# Altium PCB DDS.PcbDoc (part 1 of 2)
Units mm, origin at the board's own origin, x right, y up, seen from the top; angles counter-clockwise.
Board outline 60 x 140 mm, 4 copper layers (Top Layer, GND, Supply, Bottom Layer), stack 0.778 mm thick; 241 components, 138 nets, 781 pads, 160 vias.
Unrouted connection lines stored in the file: 258.
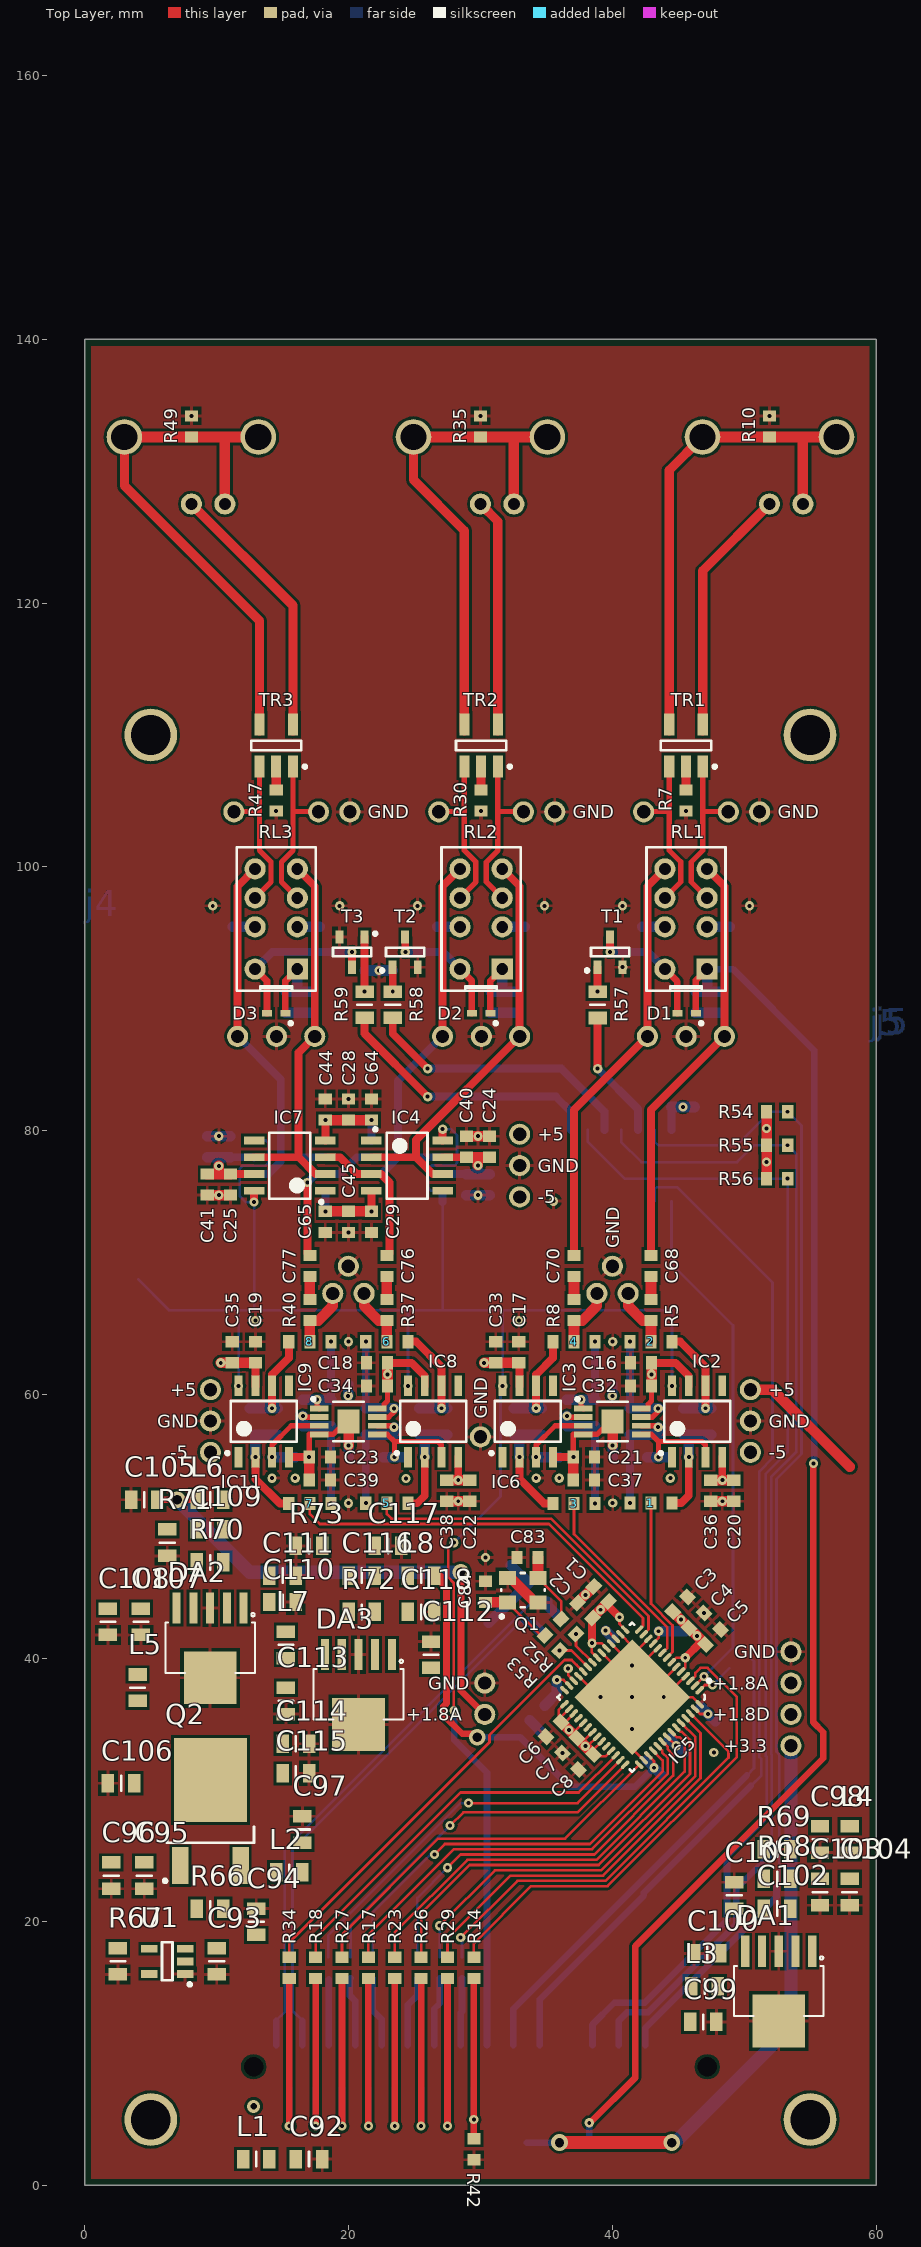
[diagram p0: Top Layer view]
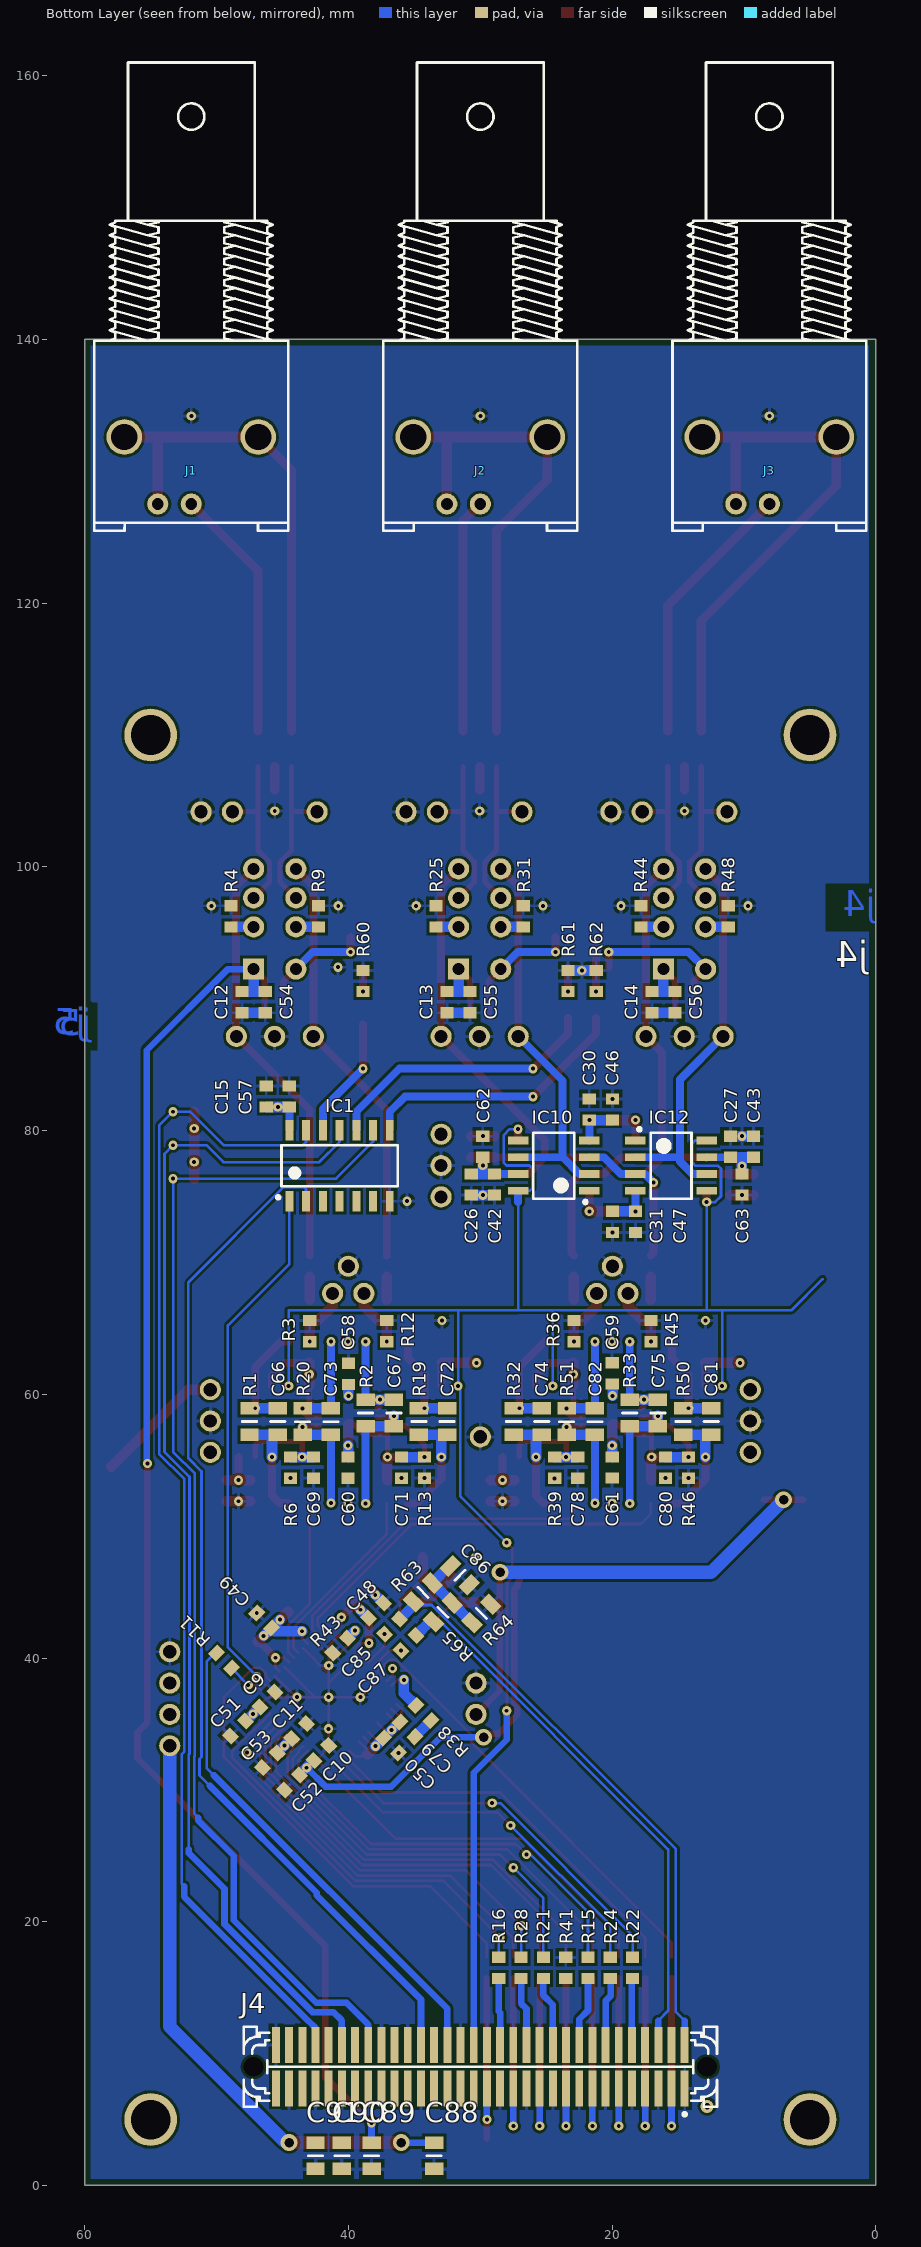
[diagram p1: Bottom Layer view, seen from below]
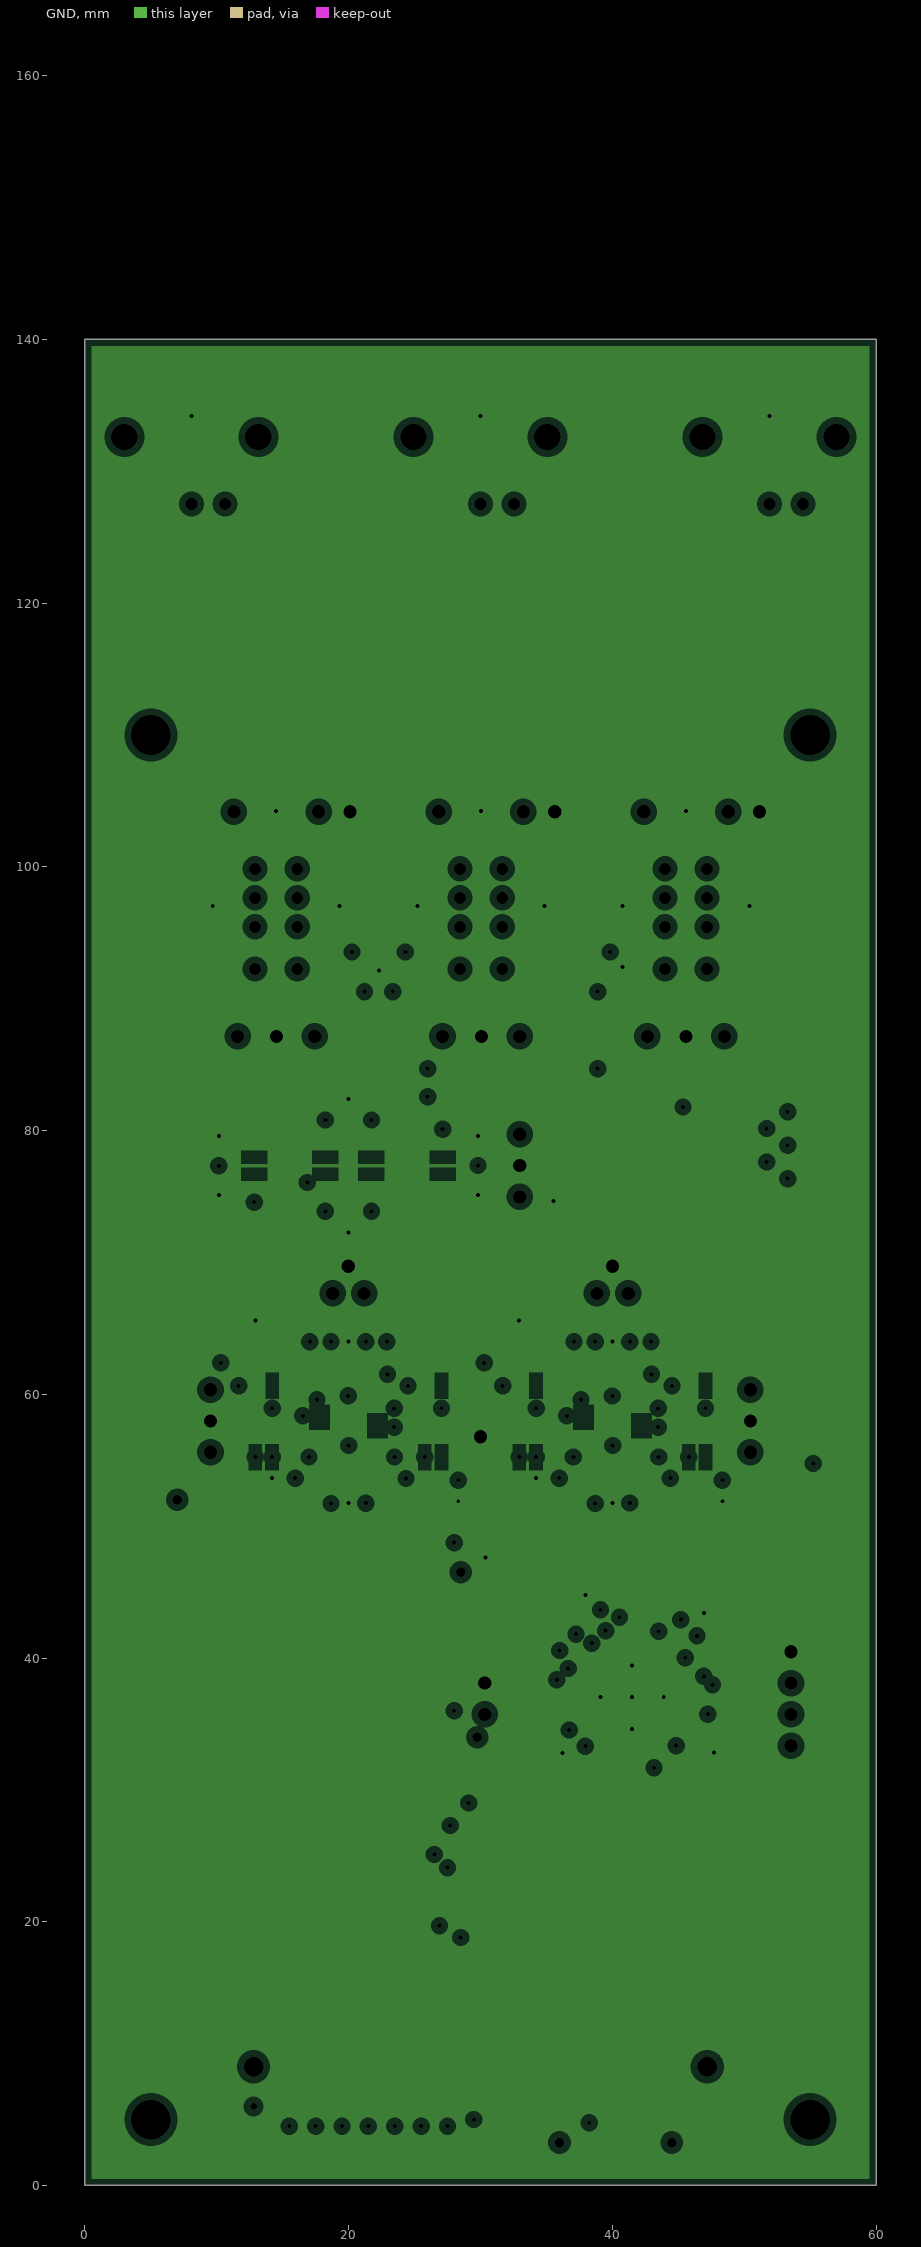
[diagram p2: GND, clearances drawn from the general rule]
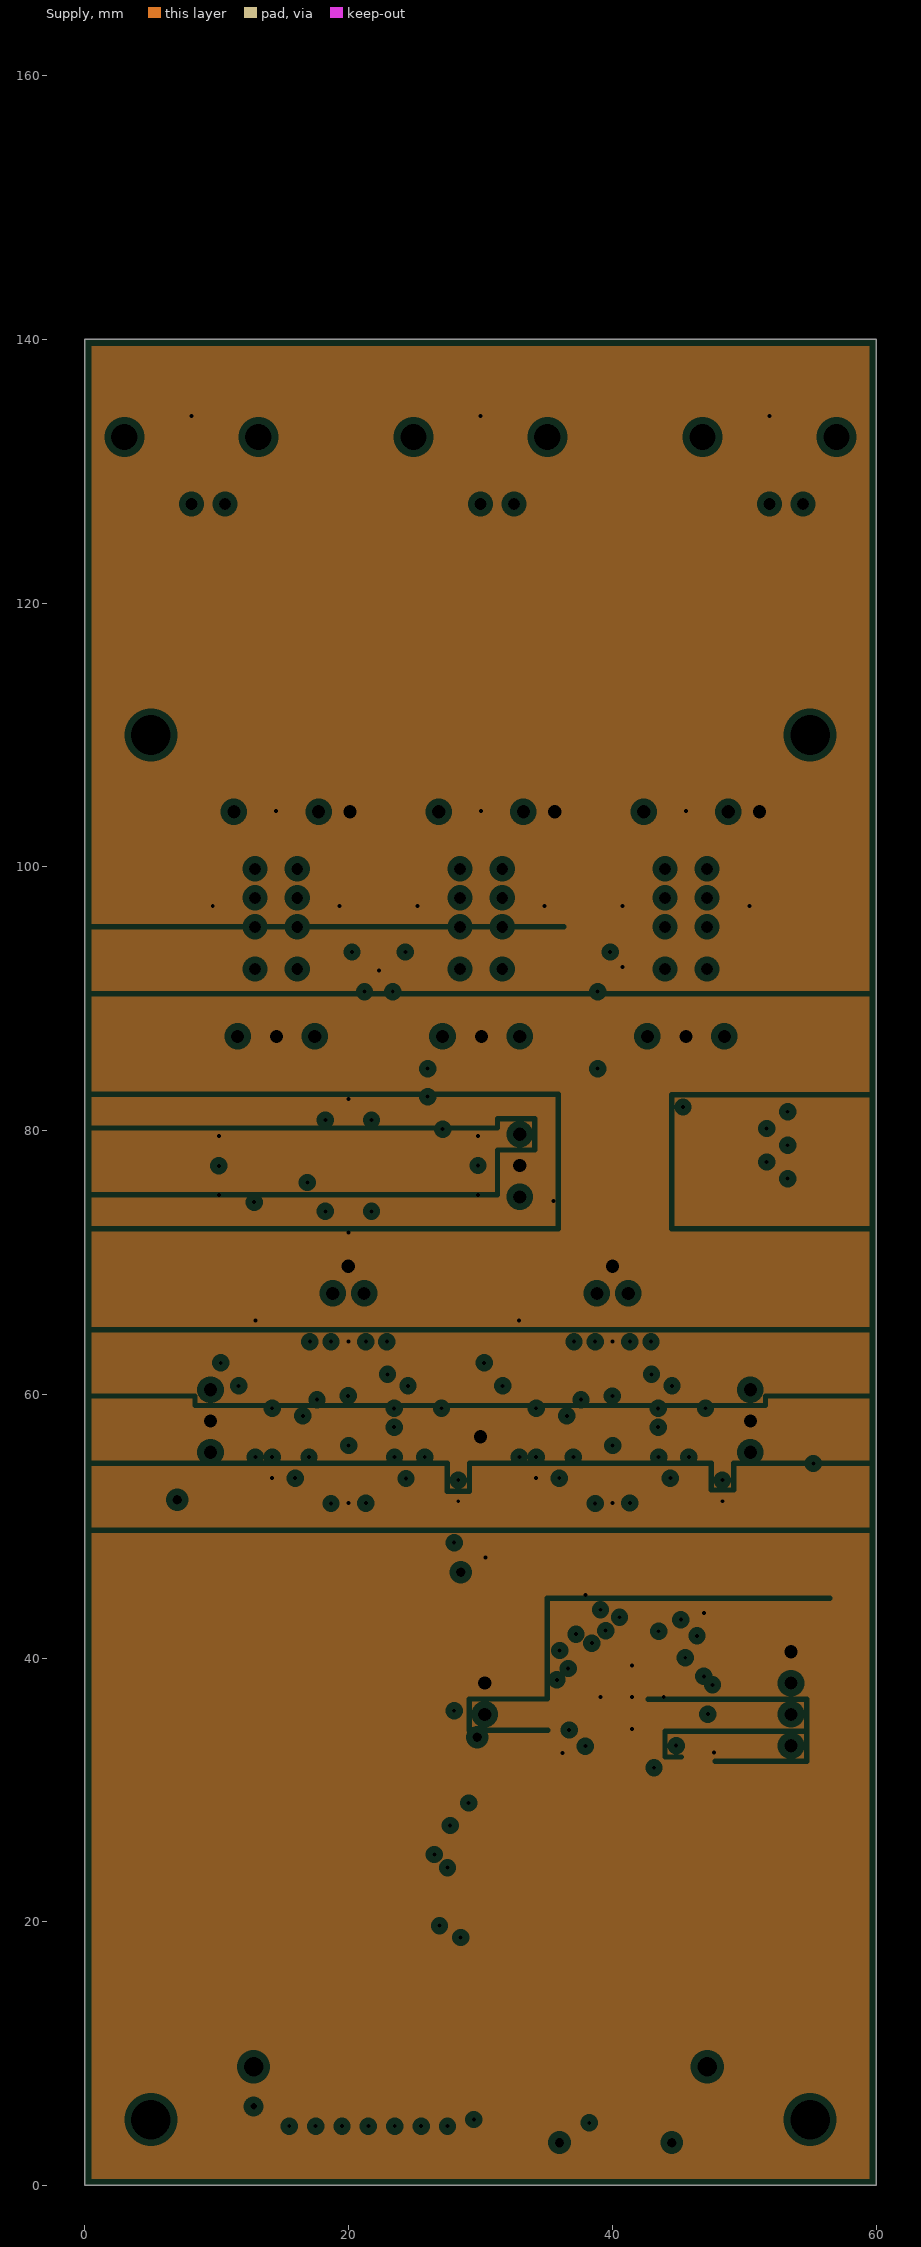
[diagram p3: Supply, clearances drawn from the general rule]
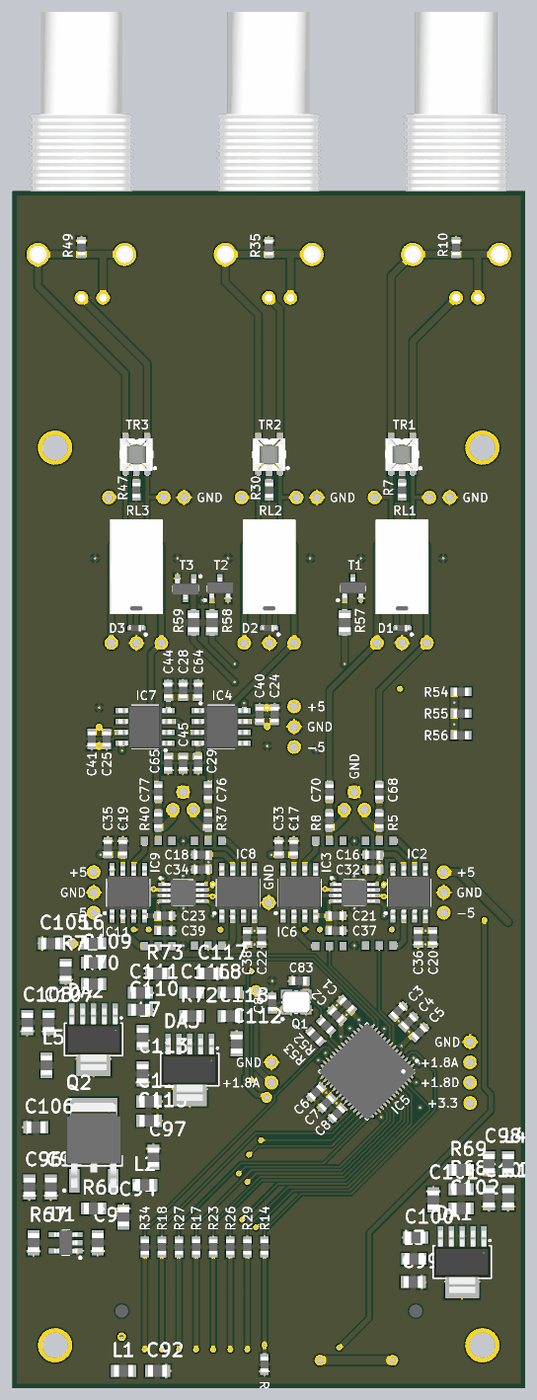
[diagram p5: 3D render of the assembled board from above, using the file's embedded part models]
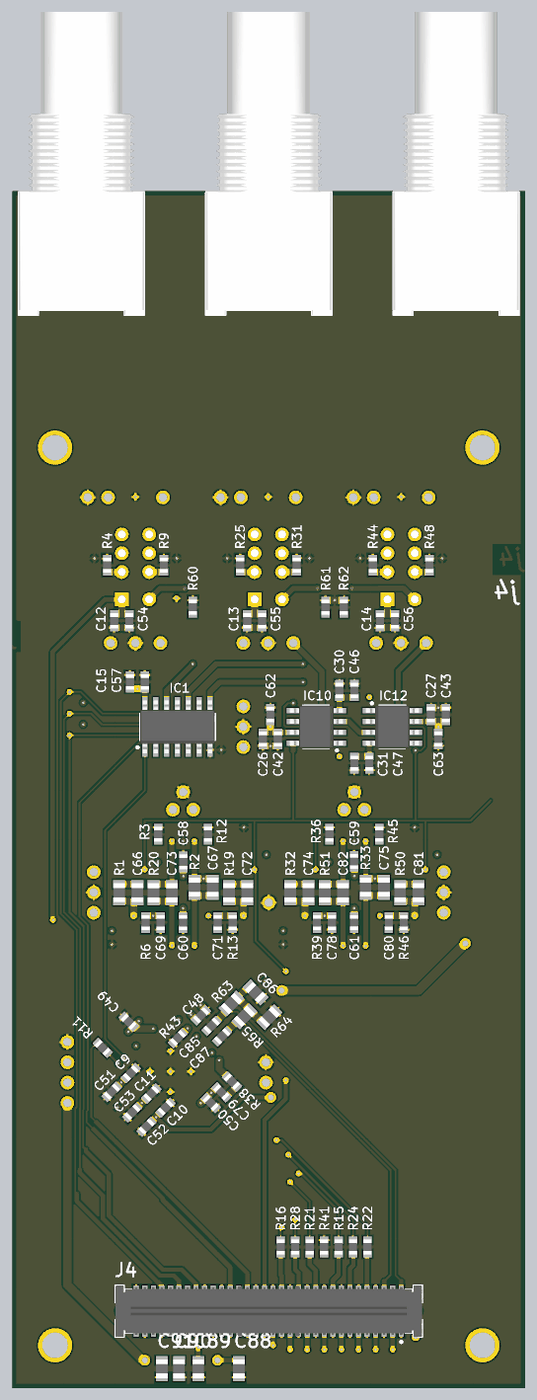
[diagram p6: 3D render of the assembled board from below, using the file's embedded part models]

## Layer stack, top to bottom
Top Solder: solder mask 0.0102, Solder Resist, Dk 3.5
Top Layer: signal copper 0.0356
Dielectric 1: core 0.254, FR-4, Dk 4.2
GND: plane copper 0.036, net GND
Dielectric 2: prepreg 0.127, Dk 4.2
Supply: plane copper 0.036, net GND
Dielectric 3: core 0.254, Dk 4.2
Bottom Layer: signal copper 0.0356
Bottom Solder: solder mask 0.0102, Solder Resist, Dk 3.5

## Board outline
0,0 60,0 60,140 0,140

## Design rules (kind name [scope] priority, off if disabled: settings)
Clearance [All] p1: gap=0.2 ignorepadtopadclearanceinfootprint=FALSE except(0: Arc-Hole Track-Hole SMDPad-Hole THPad-Hole Via-Hole Fill-Hole Poly-Hole Region-Hole Text-Hole)
ComponentClearance [All] p1: gap=0 collisioncheckmode=3 verticalgap=0 showdistances=FALSE
HoleSize [All] p1: absolutevalues=TRUE maxlimit=2.54 minlimit=0.3 maxpercent=80.000 minpercent=20.000
PlaneClearance [All] p1: clearance=0.508
PlaneConnect [All] p1: planeconnectstyle=Relief reliefexpansion=0.508 reliefentries=4 reliefconductorwidth=0.254 reliefairgap=0.254
PolygonConnect [All] p1: connectstyle=Relief reliefconductorwidth=0.254 reliefentries=4 polygonreliefangle="90 Angle" airgapwidth=0.254
RoutingVias [All] p1: holewidth=0.3 width=0.6 viastyle="Through Hole" minholewidth=0.3 minwidth=0.6 maxholewidth=2 maxwidth=2.7
SilkToSilkClearance [All] p1: silktosilkclearance=0.2
SolderMaskExpansion [All] p1: expansion=0.102
Width [All] p1: maxlimit=1.5 minlimit=0.2 preferedwidth=0.2
25 further rules are at their usual default settings.

## Classes and differential pairs
component class DDS_LDOs: C92 C93 C94 C95 C96 C97 C98 C99 C100 C101 C102 C103 C104 C105 C106 C107 C108 C109 C110 C111 C112 C113 C114 C115 C116 C117 C118 DA1 DA2 DA3 L1 L2 L3 L4 L5 L6 L7 L8 Q2 R66 R67 R68 R69 R70 R71 R72 R73 U1
component class DDS: 1 2 3 4 5 6 7 8 * C1 C2 C3 C4 C5 C6 C7 C8 C9 C10 C11 C12 C13 C14 C15 C16 C17 C18 C19 C20 C21 C22 C23 C24 C25 C26 C27 C28 C29 C30 C31 C32 C33 C34 C35 C36 C37 C38 C39 C40 C41 C42 C43 C44 C45 C46 C47 C48 C49 C50 C51 C52 C53 C54 C55 C56 C57 C58 C59 C60 C61 C62 C63 C64 C65 C66 C67 C68 C69 C70 C71 C72 C73 C74 C75 C76 C77 C78 C79 C80 C81 C82 C83 C84 C85 C86 C87 C88 C89 C90 C91 D1 D2 D3 IC1 IC2 IC3 IC4 IC5 IC6 IC7 IC8 IC9 IC10 IC11 IC12 J1 J2 J3 J4 J6 Q1 R1 R2 R3 R4 R5 R6 R7 R8 R9 R10 R11 R12 R13 R14 R15 R16 R17 R18 R19 R20 R21 R22 R23 R24 R25 R26 R27 R28 R29 R30 R31 R32 R33 R34 R35 R36 R37 R38 R39 R40 R41 R42 R43 R44 R45 R46 R47 R48 R49 R50 R51 R52 R53 R54 R55 R56 R57 R58 R59 R60 R61 R62 R63 R64 R65 RL1 RL2 RL3 T1 T2 T3 TR1 TR2 TR3

## Components (designator, comment, footprint, x,y, rotation, side; value= is the part's Value field where it differs from the comment)
1 "Jumper" JUMPER 44.534,51.753 r180 top
2 "Jumper" JUMPER 44.534,63.99 r180 top
3 "Jumper" JUMPER 35.496,51.715 r0 top
4 "Jumper" JUMPER 35.496,63.99 r0 top
5 "Jumper" JUMPER 24.504,51.74 r180 top
6 "Jumper" JUMPER 24.504,63.99 r180 top
7 "Jumper" JUMPER 15.466,51.715 r0 top
8 "Jumper" JUMPER 15.466,63.99 r0 top
C1 "100n" 0603 39.159,44.852 r135 top
C2 "100n" 0603 37.921,43.615 r135 top
C3 "100n" 0603 45.151,44.078 r45 top
C4 "100n" 0603 46.389,42.84 r45 top
C5 "100n" 0603 47.626,41.603 r45 top
C6 "100n" 0603 35.534,34.596 r225 top
C7 "100n" 0603 36.772,33.359 r225 top
C8 "100n" 0603 38.009,32.121 r225 top
C9 "100n" 0603 46.134,36.853 r135 bottom
C10 "100n" 0603 42.059,32.803 r135 bottom
C11 "100n" 0603 43.734,34.453 r135 bottom
C12 "100n" 0603 48.064,89.74 r270 bottom
C13 "100n" 0603 32.525,89.74 r270 bottom
C14 "100n" 0603 16.986,89.74 r270 bottom
C15 "100n" 0603 46.235,82.59 r90 bottom
C16 "100n" 0603 42.175,62.39 r180 top
C17 "100n" 0603 32.91,63.19 r90 top
C18 "100n" 0603 22.15,62.39 r180 top
C19 "100n" 0603 12.93,63.19 r90 top
C20 "100n" 0603 49.215,52.69 r270 top
C21 "100n" 0603 37.845,55.24 r0 top
C22 "100n" 0603 29.19,52.69 r270 top
C23 "100n" 0603 17.82,55.24 r0 top
C24 "100n" 0603 30.685,78.775 r90 top
C25 "100n" 0603 11.035,75.905 r270 top
C26 "100n" 0603 30.685,75.905 r270 bottom
C27 "100n" 0603 11.035,78.775 r90 bottom
C28 "100n" 0603 19.985,81.6 r90 top
C29 "100n" 0603 21.735,73.08 r270 top
C30 "100n" 0603 21.735,81.6 r90 bottom
C31 "100n" 0603 19.985,73.08 r270 bottom
C32 "10n" 0603 42.175,60.64 r0 top
C33 "10n" 0603 31.16,63.19 r270 top
C34 "10n" 0603 22.15,60.64 r0 top
C35 "10n" 0603 11.18,63.19 r270 top
C36 "10n" 0603 47.465,52.69 r90 top
C37 "10n" 0603 37.845,53.49 r180 top
C38 "10n" 0603 27.44,52.69 r90 top
C39 "10n" 0603 17.82,53.49 r180 top
C40 "10n" 0603 28.935,78.775 r270 top
C41 "10n" 0603 9.285,75.905 r90 top
C42 "10n" 0603 28.935,75.905 r90 bottom
C43 "10n" 0603 9.285,78.775 r270 bottom
C44 "10n" 0603 18.235,81.6 r270 top
C45 "10n" 0603 19.985,73.08 r90 top
C46 "10n" 0603 19.985,81.6 r270 bottom
C47 "10n" 0603 18.235,73.08 r90 bottom
C48 "10u" 0603 37.921,43.615 r315 bottom
C49 "10u" 0603 46.389,42.84 r225 bottom
C50 "10u" 0603 36.772,33.359 r45 bottom
C51 "10u" 0603 48.366,34.646 r135 bottom
C52 "10u" 0603 44.291,30.571 r135 bottom
C53 "10u" 0603 45.966,32.246 r135 bottom
C54 "10u" 0603 46.314,89.74 r90 bottom
C55 "10u" 0603 30.775,89.74 r90 bottom
C56 "10u" 0603 15.236,89.74 r90 bottom
C57 "10u" 0603 44.485,82.59 r270 bottom
C58 "10u" 0603 40,61.55 r270 bottom
C59 "10u" 0603 20,61.59 r270 bottom
C60 "10u" 0603 40.03,54.44 r90 bottom
C61 "10u" 0603 20,54.443 r90 bottom
C62 "10u" 0603 29.81,78.775 r270 bottom
C63 "10u" 0603 10.16,75.905 r90 bottom
C64 "10u" 0603 21.735,81.6 r270 top
C65 "10u" 0603 18.235,73.08 r90 top
C66 "=Value" 0805 45.365,57.943 r90 bottom
C67 "=Value" 0805 36.557,58.58 r90 bottom
C68 "=Value" 0603 42.934,69.73 r90 top
C69 "1n" 0603 42.65,54.44 r90 bottom
C70 "=Value" 0603 37.096,69.73 r90 top
C71 "1n" 0603 34.225,54.44 r270 bottom
C72 "=Value" 0805 32.517,57.943 r90 bottom
C73 "=Value" 0805 41.334,57.93 r90 bottom
C74 "=Value" 0805 25.342,57.943 r90 bottom
C75 "=Value" 0805 16.527,58.58 r90 bottom
C76 "=Value" 0603 22.904,69.73 r90 top
C77 "=Value" 0603 17.066,69.73 r90 top
C78 "1n" 0603 22.612,54.44 r90 bottom
C79 "680p" 0603 35.534,34.596 r225 bottom
C80 "1n" 0603 14.2,54.44 r270 bottom
C81 "=Value" 0805 12.487,57.943 r90 bottom
C82 "=Value" 0805 21.304,57.93 r90 bottom
C83 "39p" 0603 33.565,47.623 r180 top
C84 "39p" 0603 30.389,45.022 r90 top
C85 "100n" 0603 36.684,42.378 r135 bottom
C86 "0.1n" 0805 31.55,46.275 r225 bottom
C87 "100n" 0603 35.447,41.14 r135 bottom
C88 "100nF" 0805 33.5,2.25 r90 bottom
C89 "100nF" 0805 38.25,2.25 r90 bottom
C90 "100nF" 0805 40.5,2.25 r90 bottom
C91 "100nF" 0805 42.5,2.25 r90 bottom
C92 "10uF" 0805 17,2 r180 top
C93 "2u2" 0805 10,17 r90 top
C94 "100nF" 0805 13,20 r270 top
C95 "100nF" 0805 4.5,23.5 r90 top
C96 "2u2" 0805 2,23.5 r90 top
C97 "100nF" 0805 16.5,27 r270 top
C98 "100nF" 0805 55.75,26.25 r90 top
C99 "10uF" 0805 46.9,12.4 r180 top
C100 "2u2" 0805 47.2,17.6 r0 top
C101 "100nF" 0805 49.25,22 r270 top
C102 "10nF" 0805 52.5,21 r0 top
C103 "100nF" 0805 55.75,22.25 r90 top
C104 "2u2" 0805 58,22.25 r90 top
C105 "100nF" 0805 4.5,52 r0 top
C106 "10uF" 0805 2.75,30.5 r0 top
C107 "2u2" 0805 4.25,42.75 r90 top
C108 "100nF" 0805 1.75,42.75 r90 top
C109 "10nF" 0805 9.5,49.75 r0 top
C110 "100nF" 0805 15,44.25 r180 top
C111 "2u2" 0805 15,46.25 r180 top
C112 "100nF" 0805 26.25,40.25 r270 top
C113 "10uF" 0805 15.25,36.75 r90 top
C114 "2u2" 0805 16,33.5 r180 top
C115 "100nF" 0805 16,31.25 r180 top
C116 "10nF" 0805 21,46.25 r0 top
C117 "100nF" 0805 23,48.5 r180 top
C118 "2u2" 0805 25.5,43.5 r180 top
D1 "Diode" SODFL1608X65N 45.639,88.89 r180 top
D2 "Diode" SODFL1608X65N 30.05,88.89 r180 top
D3 "Diode" SODFL1608X65N 14.511,88.89 r180 top
DA1 "REG104GAADJ" SOT223_6-127 52.623,14.754 r180 top value=ADJ
DA2 "REG104GAADJ" SOT223_6-127 9.5,40.786 r180 top value=ADJ
DA3 "REG104GAADJ" SOT223_6-127 20.75,37.25 r180 top value=ADJ
IC1 "74HC14" SOIC127P600X175-14N 40.675,77.34 r90 bottom
IC2 "OPA690" SOIC127P600X175-8N 46.435,57.94 r90 top
IC3 "LTC6229" SOP65P490X110-9N-R168X188 40.01,57.94 r0 top
IC4 "OPA690" SOIC127P600X175-8N 24.435,77.34 r0 top
IC5 "AD9958" QFN50P800X800X80-57N-S670 41.5,37.032 r225 top
IC6 "OPA690" SOIC127P600X175-8N 33.59,57.94 r90 top
IC7 "OPA690" SOIC127P600X175-8N 15.535,77.34 r180 top
IC8 "OPA690" SOIC127P600X175-8N 26.41,57.94 r90 top
IC9 "LTC6229" SOP65P490X110-9N-R168X188 19.985,57.94 r0 top
IC10 "OPA690" SOIC127P600X175-8N 24.435,77.34 r0 bottom
IC11 "OPA690" SOIC127P600X175-8N 13.565,57.94 r90 top
IC12 "OPA690" SOIC127P600X175-8N 15.535,77.34 r180 bottom
J1 "TYCO-5413879" TYCO_1-5413879 51.92,133 r90 bottom
J2 "TYCO-5413879" TYCO_1-5413879 30,133 r90 bottom
J3 "TYCO-5413879" TYCO_1-5413879 8.08,133 r90 bottom
J4 "PCI_PMC" TYCO_120527-1 12.8,9 r0 bottom
L1 "BLM211k" 0805 13,2 r180 top value=1k
L2 "BLM211k" 0805 15.5,23.75 r0 top value=1k
L3 "BLM211k" 0805 47,15.1 r0 top value=1k
L4 "BLM211k" 0805 58,26.25 r90 top value=1k
L5 "BLM211k" 0805 4,37.75 r90 top value=1k
L6 "BLM211k" 0805 9.5,52 r180 top value=1k
L7 "BLM211k" 0805 15.25,41 r90 top value=1k
L8 "BLM211k" 0805 25.5,46.25 r0 top value=1k
Q1 "CX3225SB" XTAL_KYOCERA_CX3225SB 33.215,45.147 r90 top
Q2 "MJD2955" DPAK 9.53,28.4 r90 top
R1 "=Value" 0805 47.504,57.943 r90 bottom
R2 "=Value" 0805 38.696,58.58 r90 bottom
R3 "1k" 0603 42.934,64.79 r90 bottom
R4 "=Value" 0603 48.899,96.25 r270 bottom
R5 "=Value" 0603 42.934,66.39 r90 top
R6 "3k" 0603 44.4,54.44 r90 bottom
R7 "DNP" 0603 45.589,105.04 r90 top
R8 "=Value" 0603 37.096,66.39 r90 top
R9 "=Value" 0603 42.279,96.25 r270 bottom
R10 "0" 0603 51.92,133.4 r270 top
R11 "1k" 0603 49.441,39.802 r225 bottom
R12 "1k" 0603 37.096,64.79 r270 bottom
R13 "3k" 0603 35.975,54.44 r90 bottom
R14 "1k" 0603 29.5,16.5 r90 top
R15 "1k" 0603 21.833,16.5 r90 bottom
R16 "1k" 0603 28.6,16.5 r90 bottom
R17 "1k" 0603 21.5,16.5 r90 top
R18 "1k" 0603 17.5,16.5 r270 top
R19 "=Value" 0805 34.656,57.943 r90 bottom
R20 "=Value" 0805 43.483,57.93 r90 bottom
R21 "1k" 0603 25.217,16.5 r90 bottom
R22 "1k" 0603 18.45,16.5 r270 bottom
R23 "1k" 0603 23.5,16.5 r90 top
R24 "1k" 0603 20.142,16.5 r270 bottom
R25 "=Value" 0603 33.36,96.25 r270 bottom
R26 "1k" 0603 25.5,16.5 r90 top
R27 "1k" 0603 19.5,16.5 r270 top
R28 "1k" 0603 26.908,16.5 r90 bottom
R29 "1k" 0603 27.5,16.5 r90 top
R30 "DNP" 0603 30.05,105.04 r90 top
R31 "=Value" 0603 26.74,96.25 r270 bottom
R32 "=Value" 0805 27.481,57.943 r90 bottom
R33 "=Value" 0805 18.666,58.58 r90 bottom
R34 "1k" 0603 15.5,16.5 r90 top
R35 "0" 0603 30,133.4 r270 top
R36 "1k" 0603 22.904,64.79 r90 bottom
R37 "=Value" 0603 22.904,66.39 r90 top
R38 "0" 0603 34.298,35.833 r45 bottom
R39 "3k" 0603 24.357,54.44 r90 bottom
R40 "=Value" 0603 17.066,66.39 r90 top
R41 "10k" 0603 23.525,16.5 r270 bottom
R42 "10k" 0603 29.5,2.75 r90 top
R43 "1.91k" 0603 40.625,40.937 r135 bottom
R44 "=Value" 0603 17.821,96.25 r270 bottom
R45 "1k" 0603 17.066,64.79 r270 bottom
R46 "3k" 0603 15.95,54.44 r90 bottom
R47 "DNP" 0603 14.511,105.04 r90 top
R48 "=Value" 0603 11.201,96.25 r270 bottom
R49 "0" 0603 8.08,133.4 r270 top
R50 "=Value" 0805 14.626,57.943 r90 bottom
R51 "=Value" 0805 23.453,57.93 r90 bottom
R52 "0" 0603 36.684,42.378 r135 top
R53 "0" 0603 35.447,41.14 r135 top
R54 "100k" 0603 52.5,81.43 r180 top
R55 "100k" 0603 52.5,78.89 r180 top
R56 "100k" 0603 52.5,76.35 r180 top
R57 "6k2" 0805 38.889,89.54 r90 top
R58 "6k2" 0805 23.35,89.54 r90 top
R59 "6k2" 0805 21.211,89.54 r90 top
R60 "100k" 0603 38.889,91.34 r270 bottom
R61 "100k" 0603 23.35,91.34 r270 bottom
R62 "100k" 0603 21.211,91.34 r270 bottom
R63 "49.9" 0805 34.355,44.982 r315 bottom
R64 "49.9" 0805 29.918,43.382 r135 bottom
R65 "49.9" 0805 32.843,43.469 r135 bottom
R66 "56k" 0805 9.5,21 r0 top
R67 "18k" 0805 2.5,17 r90 top
R68 "4k3" 0805 52.5,23.25 r0 top
R69 "1k5" 0805 52.5,25.5 r180 top
R70 "5k1" 0805 9.5,47.25 r0 top
R71 "13k" 0805 6.25,48.75 r90 top
R72 "5k1" 0805 21,43.5 r0 top
R73 "13k" 0805 17,48.5 r0 top
RL1 "G6J-2P_Y" G6J-2P-Y 45.589,96.05 r90 top
RL2 "G6J-2P_Y" G6J-2P-Y 30.05,96.05 r90 top
RL3 "G6J-2P_Y" G6J-2P-Y 14.511,96.05 r90 top
T1 "BC847C" SOT95P230X110-3N 39.837,93.54 r90 top
T2 "BC847C" SOT95P230X110-3N 24.292,93.54 r90 top
T3 "BC847C" SOT95P230X110-3N 20.264,93.54 r270 top
TR1 "TC1-1T+" AT224-1 45.589,109.205 r180 top
TR2 "TC1-1T+" AT224-1 30.05,109.205 r180 top
TR3 "TC1-1T+" AT224-1 14.511,109.205 r180 top
U1 "ADP7182ADJ" SOT23-5 6.25,17 r180 top value=ADJ

## Footprints (in the part's own frame and the unit in brackets; to place one, negate y for a bottom-side part, rotate by r counter-clockwise, add the part's x,y. Pads: shape width x height; smd on the part's side, far side on the other; paste and mask are expansions set on the pad)
0603 [mm] "Chip Resistor, EIA 0603, Metric 1608, Body 1.6x0.8mm, IPC Medium Density"
  rect 0.85x1 smd: 1(-0.8,0) 2(0.8,0)
  body extent -0.87,-0.47 0.88,0.48, height 0.6
0805 [mm] "Chip Resistor, EIA 0805, Metric 2012, Body 2.0x1.2mm, IPC Medium Density"
  rect 0.95x1.4 smd: 1(-1,0) 2(1,0)
  silkscreen extent 0,-0.55 0,0.55, body extent -1.1,-0.67 1.1,0.68, height 0.6
AT224-1 [mm] "MINI-CIRCUITS RF Transformer, Case AT224-1 - Body 3.81X3.81mm"
  rect 0.76x1.65 smd: 1(-1.27,1.59) 2(0,1.59) 3(1.27,1.59) 4(1.27,-1.59) 6(-1.27,-1.59)
  silkscreen extent -2.3,-0.37 1.91,1.72, body extent -1.9,-1.9 1.91,1.91, height 4.06
DPAK [mm] "TO-252AA DPAK TO, 2.28mm pitch; 2 pin,9.90mm L X 6.56mm W X 2.38mm H body, IPC Medium Density"
  rect 2.8x1.25 smd: 1(-4.15,2.28) 2(-4.15,-2.28)
  rect 6.4x5.55 smd: 3(2.35,0)
  silkscreen extent -5.42,-3.3 -1.2,3.57, body extent -4.99,-3.27 4.95,3.27, height 2.28
G6J-2P-Y [mm] "THT Relay, Body 10.9mm x 6mm, OMRON_G6J-2P"
  rect 1.6x1.6 hole 0.9: 1(-3.8,-1.6)
  round 1.6 hole 0.9: 2(-0.6,-1.6) 3(1.6,-1.6) 4(3.8,-1.6) 5(3.8,1.6) 6(1.6,1.6) 7(-0.6,1.6) 8(-3.8,1.6)
  silkscreen extent -5.45,-3 5.45,3, body extent -5.45,-3 5.45,3, height 9.3
JUMPER [mm] "Jumper, SMD"
  rect 0.85x1 smd: 1(0,0) 2(1.6,0) 3(3.2,0)
QFN50P800X800X80-57N-S670 [mm] "QFN,0.50mm Pitch, Square; 56 pin, 8.00mm L X 8.00mm W X 0.80mm H body (6.7mm X 6.7mm thermal tab), IPC Medium Density"
  oval 0.8x0.3 smd: 1(-4,3.25) 2(-4,2.75) 3(-4,2.25) 4(-4,1.75) 5(-4,1.25) 6(-4,0.75) 7(-4,0.25) 8(-4,-0.25) 9(-4,-0.75) 10(-4,-1.25) 11(-4,-1.75) 12(-4,-2.25) 13(-4,-2.75) 14(-4,-3.25) 29(4,-3.25) 30(4,-2.75) 31(4,-2.25) 32(4,-1.75) 33(4,-1.25) 34(4,-0.75) 35(4,-0.25) 36(4,0.25) 37(4,0.75) 38(4,1.25) 39(4,1.75) 40(4,2.25) 41(4,2.75) 42(4,3.25)
  oval 0.3x0.8 smd: 15(-3.25,-4) 16(-2.75,-4) 17(-2.25,-4) 18(-1.75,-4) 19(-1.25,-4) 20(-0.75,-4) 21(-0.25,-4) 22(0.25,-4) 23(0.75,-4) 24(1.25,-4) 25(1.75,-4) 26(2.25,-4) 27(2.75,-4) 28(3.25,-4) 43(3.25,4) 44(2.75,4) 45(2.25,4) 46(1.75,4) 47(1.25,4) 48(0.75,4) 49(0.25,4) 50(-0.25,4) 51(-0.75,4) 52(-1.25,4) 53(-1.75,4) 54(-2.25,4) 55(-2.75,4) 56(-3.25,4)
  rect 6.2x6.2 smd: 57(0,0)
  silkscreen extent -5.12,-4 4,4, body extent -4,-4 4,4, height 0.8
SODFL1608X65N [mm] "Ultra Small Outline Diode Flat Lead (SOD-523), Body; 1.2mm L X 0.8mm W X 0.65mm H, IPC Medium Density"
  rect 0.75x0.5 smd: 1(-0.7,0) 2(0.7,0)
  silkscreen extent -1.23,0.63 -0.98,0.87, body extent -0.82,-0.42 0.83,0.43, height 0.65
SOIC127P600X175-8N [mm] "SOIC 8, Pitch 1.27mm - Body 4x5mm, IPC Medium Density"
  rect 1.55x0.6 smd: 1(-2.7,1.905) 2(-2.7,0.635) 3(-2.7,-0.635) 4(-2.7,-1.905) 5(2.7,-1.905) 6(2.7,-0.635) 7(2.7,0.635) 8(2.7,1.905)
  silkscreen extent -2.52,-2.5 1.55,2.88, body extent -3.1,-2.5 3.1,2.5, height 1.75
SOIC127P600X175-14N [mm] "SOIC 14, Pitch 1.27mm - Body 4x8.75mm, IPC Medium Density"
  rect 1.55x0.6 smd: 1(-2.7,3.81) 2(-2.7,2.54) 3(-2.7,1.27) 4(-2.7,0) 5(-2.7,-1.27) 6(-2.7,-2.54) 7(-2.7,-3.81) 8(2.7,-3.81) 9(2.7,-2.54) 10(2.7,-1.27) 11(2.7,0) 12(2.7,1.27) 13(2.7,2.54) 14(2.7,3.81)
  silkscreen extent -2.52,-4.4 1.55,4.79, body extent -3.1,-4.37 3.1,4.38, height 1.75
SOP65P490X110-9N-R168X188 [mm] "SOP, 0.65mm Pitch; 8 Pin, 3.00mm W X 3.00mm L X 1.10mm H body, (w/Thermal Tab 1.68X 1.88mm), IPC Medium Density"
  rect 1.4x0.45 smd: 1(-2.2,0.975) 2(-2.2,0.325) 3(-2.2,-0.325) 4(-2.2,-0.975) 5(2.2,-0.975) 6(2.2,-0.325) 7(2.2,0.325) 8(2.2,0.975)
  rect 1.65x1.85 smd: 9(0,0)
  silkscreen extent -2.77,-1.5 1.15,1.82, body extent -2.45,-1.55 2.45,1.55, height 1.1
SOT23-5 [mm] "SOT, 0.95mm Pitch; 5 Pin,1.55mm W X 2.90mm L X 1.45mm H body, IPC Medium Density"
  rect 1.25x0.6 smd: 1(-1.35,0.95) 2(-1.35,0) 3(-1.35,-0.95) 4(1.35,-0.95) 5(1.35,0.95)
  silkscreen extent -1.83,-1.45 0.4,1.87, body extent -1.35,-1.45 1.35,1.45, height 1.45
SOT95P230X110-3N [mm] "SOT23, 3 pin, Pitch 0.95mm - 1.3mm W X 2.9mm L X 1.1mm H, IPC Medium Density"
  rect 1x0.6 smd: 1(-1.15,0.95) 2(-1.15,-0.95) 3(1.15,0)
  silkscreen extent -1.52,-1.45 0.33,1.87, body extent -1.08,-1.5 1.25,1.5, height 1.1
SOT223_6-127 [mil]
  rect 24x93 smd paste+0 mask+0: 1(-100,-118.5) 2(-50,-118.5) 3(0,-118.5) 4(50,-118.5) 5(100,-118.5)
  rect 157.48x157.48 smd: 6(0,90)
  silkscreen extent -134,-103 134,75, body extent -129,-143 129,143, height 71
TYCO_1-5413879 [mm] "50 Ohms  BNC Elbow PCB Socket With Mounting Posts"
  round 1.6 hole 0.9: 1(-5.48,0) 2(-5.48,2.54)
  round 2.7 hole 2: 2(-0.4,-5.08) 2(-0.4,5.08)
  silkscreen extent -7.5,-7.35 28,7.35, body extent -7.5,-7.35 28,7.35, height 13.16
TYCO_120527-1 [mm] "1mm Centerline, FH (IEEE 1386) Surface Mount, Stacking Board-to-Board Male Connectors"
  rect 0.6x2.7 smd: 1(1.7,1.65) 2(1.7,-1.65) 3(2.7,1.65) 4(2.7,-1.65) 5(3.7,1.65) 6(3.7,-1.65) 7(4.7,1.65) 8(4.7,-1.65) 9(5.7,1.65) 10(5.7,-1.65) 11(6.7,1.65) 12(6.7,-1.65) 13(7.7,1.65) 14(7.7,-1.65) 15(8.7,1.65) 16(8.7,-1.65) 17(9.7,1.65) 18(9.7,-1.65) 19(10.7,1.65) 20(10.7,-1.65) 21(11.7,1.65) 22(11.7,-1.65) 23(12.7,1.65) 24(12.7,-1.65) 25(13.7,1.65) 26(13.7,-1.65) 27(14.7,1.65) 28(14.7,-1.65) 29(15.7,1.65) 30(15.7,-1.65) 31(16.7,1.65) 32(16.7,-1.65) 33(17.7,1.65) 34(17.7,-1.65) 35(18.7,1.65) 36(18.7,-1.65) 37(19.7,1.65) 38(19.7,-1.65) 39(20.7,1.65) 40(20.7,-1.65) 41(21.7,1.65) 42(21.7,-1.65) 43(22.7,1.65) 44(22.7,-1.65) 45(23.7,1.65) 46(23.7,-1.65) 47(24.7,1.65) 48(24.7,-1.65) 49(25.7,1.65) 50(25.7,-1.65) 51(26.7,1.65) 52(26.7,-1.65) 53(27.7,1.65) 54(27.7,-1.65) 55(28.7,1.65) 56(28.7,-1.65) 57(29.7,1.65) 58(29.7,-1.65) 59(30.7,1.65) 60(30.7,-1.65) 61(31.7,1.65) 62(31.7,-1.65) 63(32.7,1.65) 64(32.7,-1.65)
  round 1 hole 1.5 unplated: 65(0,0) 66(34.4,0)
  silkscreen extent -0.75,-3.03 35.15,3.72, body extent -0.75,-3.03 35.15,3.03, height 8.38
XTAL_KYOCERA_CX3225SB [mm] "SMD Crystal Kyocera, 4 Pin, 3.2mm L X 2.5mm W X 0.6mm H"
  rect 1.05x1.3 smd: 1(-0.925,1.15) 2(-0.925,-1.15) 3(0.925,-1.15) 4(0.925,1.15)
  silkscreen extent -2.12,-1.65 1.3,1.72, body extent -1.3,-1.65 1.3,1.65, height 0.6

## Part data
1 2 3 4 5 6 7 8: "0805"
C1 C2 C3 C4 C5 C6 C7 C8 C9 C10 C11 C12 C13 C14 C15 C16 C17 C18 C19 C20 C21 C22 C23 C24 C25 C26 C27 C28 C29 C30 C31 C32 C33 C34 C35 C36 C37 C38 C39 C40 C41 C42 C43 C44 C45 C46 C47 C48 C49 C50 C51 C52 C53 C54 C55 C56 C57 C58 C59 C60 C61 C62 C63 C64 C65 C66 C67 C68 C69 C70 C71 C72 C73 C74 C75 C76 C77 C78 C79 C80 C81 C82 C83 C84 C85 C86 C87 C88 C89 C90 C91 C92 C93 C94 C95 C96 C97 C98 C99 C100 C101 C102 C103 C104 C105 C106 C107 C108 C109 C110 C111 C112 C113 C114 C115 C116 C117 C118: library part Capacitor
D1 D2 D3: Voltage=30V, Device=RB521S-30, Name to order=RB521S-30, Pkg=SOD523, Price=5, SMD Solders=2, Solder Option=RM, Vendor=CTK
DA1 DA2 DA3: library part REG104GA, "Positive LDO Linear stabilizer", Tolerance="+-2% Max", Device=REG104GA, Name to order=REG104GA-A, Pkg=SOT223-6, Price=1000, SMD Solders=6, Solder Option=RM, TC=70ppm/C, Vendor="Texas Instruments", Vref=1V295
IC1: library part "Hex Inverters", "6 HEX inverters with Schmitt trigger inputs"
IC2 IC4 IC6 IC7 IC8 IC10 IC11 IC12: library part "Single Op Amp", "Wideband, Voltage-Feedback Operational Amplifier With Disable"
IC3 IC9: library part "Dual Op Amp", "0.88nV/vHz 730MHz, 500V/µs, Low Distortion Rail-to-Rail Output Op Amps with Shutdown"
IC5: library part DDS, "2-Channel, 500 MSPS DDS with 10-Bit DACs"
J1 J2 J3: library part Coax
J4: "PCI Mezzanine Connector; IEEE 1386 Mezzanine board", Manufactuer="TE Connectivity", PartField=120527-1, Pkg="PMC Male (IEEE 1386)", SolderOption=2, Vendor="TE Connectivity"
L1 L2 L3 L4 L5 L6 L7 L8: library part BLM21, "SMD Ferrite bead 0805", Device=BLM21, Pkg=SMD0805, Price=10, SMD Solders=2, Solder Option=RM, Vendor=Vishay
Q1: library part "Quartz Crystal", "25 MHz"
Q2: "PNP транзистор", Voltage=-60V, Device=MJD2955, Name to order=MJD29G55, Pkg=DPAK, Price=100, SMD Solders=3, Solder Option=RM, Vendor="ON Semiconductor"
R1 R2 R3 R4 R5 R6 R7 R8 R9 R10 R11 R12 R13 R14 R15 R16 R17 R18 R19 R20 R21 R22 R23 R24 R25 R26 R27 R28 R29 R30 R31 R32 R33 R34 R35 R36 R37 R38 R39 R40 R41 R42 R43 R44 R45 R46 R47 R48 R49 R50 R51 R52 R53 R54 R55 R56 R57 R58 R59 R60 R61 R62 R63 R64 R65 R66 R67 R68 R69 R70 R71 R72 R73: library part Resistor
RL1 RL2 RL3: library part Relay, "Ultra-compact and Slim DPDT Relay"
T1 T2 T3: library part "NPN Transistor", "NPN"
TR1 TR2 TR3: library part Transformer, "50 Ohms 0.4 to 500MHz RF Transformer"
U1: library part ADP7182, "Negative LDO Linear stabilizer", Device=ADP7182, Name to order=ADP7182AUJZ-R7, Pkg=SOT23-5, Price=100, SMD Solders=5, Solder Option=RM, Vendor="Analog Devoces", Vref=1V22

## Free pads (board coordinates)
  round 4 hole 3: 0(5,5) 0(5,110) 0(55,5) 0(55,110)
  round 1.6 hole 1: ""(9.525,55.6) ""(9.525,57.975) ""(9.525,60.35) ""(11.3,104.175) ""(11.586,87.147) ""(14.536,87.147) ""(17.436,87.147) ""(17.722,104.175) ""(18.8,67.65) ""(19.979,69.711) ""(20.097,104.175) ""(21.175,67.65) ""(26.839,104.175) ""(27.125,87.147) ""(30,56.775) ""(30.075,87.147) ""(30.325,35.725) ""(30.325,38.1) ""(32.975,87.147) ""(32.975,74.975) ""(32.975,77.35) ""(32.975,79.725) ""(33.261,104.175) ""(35.636,104.175) ""(38.83,67.65) ""(40.009,69.711) ""(41.205,67.65) ""(42.378,104.175) ""(42.664,87.147) ""(45.6,87.147) ""(48.5,87.147) ""(48.8,104.175) ""(50.475,55.6) ""(50.475,57.975) ""(50.475,60.35) ""(51.175,104.175) ""(53.55,33.35) ""(53.55,35.725) ""(53.55,38.1) ""(53.55,40.475)

## Via types
v1: diameter 0.7, hole 0.3, Top Layer to Bottom Layer, 91 vias
v2: diameter 0.7, hole 0.3, Top Layer to Bottom Layer, tented both sides, 63 vias
v3: diameter 1.27, hole 0.711, Top Layer to Bottom Layer, 5 vias
v4: diameter 1, hole 0.5, Top Layer to Bottom Layer, 1 vias

## Nets (pads, with @x,y where several pads share a name; then routed paths per layer and width w, separated by ;. In a path a pad name is that pad's centre, name@x,y a point inside that pad or via, vN(x,y) a via of type N, cw(c..) or ccw(c..) an arc to the next point about the centre after c; other vN are vias at no path point)
+1.8A: C1.1 C2.1 C3.1 C4.1 C5.1 C6.1 C7.1 C8.1 C48.2 C49.2 C50.2 C79.1 C105.2 IC5.5 IC5.7 IC5.11 IC5.15 IC5.19 IC5.21 IC5.26 IC5.29 IC5.30 IC5.31 IC5.33 IC5.35 IC5.36 IC5.37 IC5.39 L6.2 pad.@30.325,35.725 pad.@53.55,38.1 R6.1 R13.1 R39.1 R46.1 | length 78.4
  Top Layer w0.2: IC5.29@36.373,36.502 35.95,36.078 35.95,35.312 C6.1@36.1,35.162 ; v2(36.651,39.203) 36.651,38.699 IC5.26@37.081,38.269 ; IC5.30@36.727,36.148 36.1,35.521 C6.1@36.1,35.162 ; 36.987,34.287 IC5.33@37.788,35.087 ; IC5.31@37.081,35.795 36.448,35.162 C6.1@36.1,35.162 ; C7.1@37.7,33.586 IC5.35@38.495,34.38 ; v2(37.95,33.312) 38.134,33.312 IC5.36@38.848,34.027 ; C2.1@38.45,43.012 C2.1@38.487,43.049 ; C8.1@38.575,32.687 38.575,33.046 IC5.37@39.202,33.673 ; C8.1@38.725,32.537 39.48,32.537 IC5.39@39.909,32.966 ; IC5.21@38.848,40.037 38.512,40.373 38.45,40.436 v2(38.45,41.126) 39.174,41.126 IC5.19@39.555,40.744 ; C1.1@39.725,43.908 C1.1@39.725,44.287 ; v2(40.541,43.093) 40.541,42.588 IC5.15@40.97,42.159 ; IC5.11@43.091,41.098 43.52,41.527 v2(43.52,42.032) ; IC5.7@44.505,39.684 44.841,40.02 v2(45.532,40.02) 45.532,39.296 IC5.5@45.212,38.977 ; C5.1@46.735,41.222 C5.1@46.875,41.222
  Top Layer w0.5: C105.2@5.5,52 v3(7,52) L6.2@8.5,52 ; v3@28.525,46.475 28.525,37.525 pad.@30.325,35.725
  Top Layer w0.6: v2(38.45,41.126) C2.1@38.45,43.012 ; C1.1@39.725,43.908 v2(40.541,43.093) ; v2(45.532,40.02) C5.1@46.735,41.222
  Top Layer w0.8: C6.1@36.1,35.162 C8.1@38.575,32.687 ; C2.1@38.487,43.049 C1.1@39.725,44.287 ; C3.1@44.586,43.512 C5.1@46.875,41.222
  Top Layer w1: v3(28.5,46.5) v3@28.525,46.475 ; pad.@53.35,38.1 pad.@53.55,38.1
  Bottom Layer w0.2: v2@38.45,41.002 v2(38.45,41.126)
  Bottom Layer w0.8: C79.1@36.1,35.162 v2(37.95,33.312) ; C48.2@38.487,43.049 v2(39.1,43.662) ; v2(43.52,42.032) 45.58,42.032 C49.2@45.823,42.275 ; v2(45.201,42.911) v2(46.426,41.686)
  Bottom Layer w1: v3(7,52) 12.5,46.5 v3(28.5,46.5)
  other v1: 24.357,53.615 15.95,53.64 35.975,53.64 44.4,53.64
  other v2: 36.725,34.537
+1.8D: C9.1 C10.1 C51.2 C52.2 C112.2 IC5.45 IC5.55 L8.2 pad.@53.55,35.725 | length 36.3
  Top Layer w0.2: IC5.45@42.737,32.613 43.167,32.183 v2(43.167,31.679) ; IC5.55@46.273,36.148 46.666,35.755 47.241,35.755 v2(47.249,35.747)
  Top Layer w0.5: L8.2@26.5,46.25 27,46.25 27,45.9 27.15,45.75 27.15,45.5 27.425,45.225 27.425,36.556 27.2,36.331 27.2,35.669 28.619,34.25 30,34.25 v3(29.75,34)
  Top Layer w1: pad.@53.55,35.471 pad.@53.55,35.725
  Bottom Layer w0.2: C9.1@46.7,36.287 C9.1@46.725,36.287
  Bottom Layer w0.5: v3(29.75,34) 33,34 36.75,30.25 41.738,30.25 v2(43.167,31.679)
  Bottom Layer w0.8: C10.1@42.625,32.237 C52.2@43.725,31.137 ; C9.1@46.725,36.287 C51.2@47.8,35.212
+3.3: C11.1 C15.1 C53.2 C57.2 C88.2 C106.2 C113.2 IC1.14 IC5.49 J4.35 J4.39 L5.1 L7.1 pad.@53.55,33.35 R54.2 R55.2 R56.2 | length 56
  Top Layer w0.2: IC5.49@44.152,34.027 v2@44.825,33.353
  Top Layer w0.8: R56.2@51.7,76.35 R55.2@51.7,78.89 R54.2@51.7,81.43
  Top Layer w1: v3(36,3.25) v3(44.5,3.25)
  Bottom Layer w0.2: C11.1@44.3,33.887 C11.1@44.325,33.887
  Bottom Layer w0.5: C88.2@33.5,3.25 v3(36,3.25)
  Bottom Layer w0.6: IC1.14@44.485,80.04 C57.2@44.485,81.79
  Bottom Layer w0.8: C11.1@44.325,33.887 C53.2@45.4,32.812 ; C57.2@44.485,81.79 C15.1@46.235,81.79
  Bottom Layer w1: v3(44.5,3.25) 44.866,3.366 53.55,12.05 pad.@53.55,33.35
  other v1: 45.36,81.79
  other v2: 44.841,33.353 51.7,77.62 51.7,80.16
+5: C16.1 C17.1 C18.1 C19.1 C24.1 C25.1 C26.1 C27.1 C32.2 C33.2 C34.2 C35.2 C40.2 C41.2 C42.2 C43.2 C58.2 C59.2 C62.2 C63.2 C98.2 IC2.7 IC3.8 IC4.7 IC6.7 IC7.7 IC8.7 IC9.8 IC10.7 IC11.7 IC12.7 L4.2 pad.@9.525,60.35 pad.@32.975,79.725 pad.@50.475,60.35 | length 54.6
  Top Layer w0.4: IC9.8@22.185,58.915 22.693,58.915 22.693,59.241 22.95,59.498 C34.2@22.95,60.64 ; IC3.8@42.21,58.915 42.723,58.915 42.723,59.241 42.975,59.493 C32.2@42.975,60.64
  Top Layer w0.6: C25.1@11.035,76.705 IC7.7@12.835,76.705 ; IC11.7@12.93,60.64 C19.1@12.93,62.39 ; C18.1@22.95,62.39 24.775,62.39 25.775,61.39 IC8.7@25.775,60.64 ; IC4.7@27.135,77.975 C40.2@28.935,77.975 ; IC6.7@32.955,60.64 C17.1@32.955,62.39 ; C16.1@42.975,62.39 44.8,62.39 45.8,61.39 IC2.7@45.8,60.64
  Top Layer w0.8: C41.2@9.285,76.705 C25.1@11.035,76.705 ; 10.16,76.705 v1(10.16,77.325) ; v2(10.305,62.39) C35.2@11.18,62.39 C19.1@12.93,62.39 ; C34.2@22.95,60.64 C18.1@22.95,62.39 ; C40.2@28.935,77.975 C24.1@30.685,77.975 ; v1(29.81,77.355) 29.81,77.975 ; v2(30.285,62.39) C33.2@31.16,62.39 C17.1@32.91,62.39 ; C32.2@42.975,60.64 C16.1@42.975,62.39 ; pad.@50.475,60.35 52.15,60.35 58,54.5
  Bottom Layer w0.2: C59.2@19.97,60.76 C59.2@20,60.79
  Bottom Layer w0.6: C27.1@11.035,77.975 IC12.7@12.835,77.975 ; IC10.7@27.135,76.705 C42.2@28.935,76.705
  Bottom Layer w0.8: C43.2@9.285,77.975 C27.1@11.035,77.975 ; C63.2@10.16,76.705 10.16,77.975 ; v2(19.97,59.885) C59.2@19.97,60.76 ; C42.2@28.935,76.705 C26.1@30.685,76.705 ; 29.81,76.705 C62.2@29.81,77.975 ; v2(40,59.875) C58.2@40,60.75
  other v2: 22.95,61.515 42.975,61.515
+7: C91.2 C99.2 J4.55 L3.1
+12: C12.1 C13.1 C14.1 C54.2 C55.2 C56.2 C89.2 D1.1 D2.1 D3.1 J4.47 RL1.1 RL2.1 RL3.1 | length 122.8
  Top Layer w0.5: D3.1@15.211,88.89 15.211,91.35 RL3.1@16.111,92.25 ; D2.1@30.75,88.89 30.75,91.35 RL2.1@31.65,92.25 ; v1(38.25,4.75) 38.311,4.75 41.75,8.189 41.75,18.15 56,32.4 56,34.365 55.25,35.115 v1(55.25,54.75) ; D1.1@46.339,88.89 46.339,91.4 RL1.1@47.189,92.25
  Bottom Layer w0.2: 16.111,90.552 16.123,90.54
  Bottom Layer w0.5: C89.2@38.25,3.25 v1(38.25,4.75) ; RL1.1@47.189,92.25 49.143,92.25 55.3,86.093 55.3,54.8 v1(55.25,54.75)
  Bottom Layer w0.8: C56.2@15.236,90.54 16.123,90.54 C14.1@17.011,90.54 ; 16.111,90.552 RL3.1@16.111,92.25 ; C55.2@30.775,90.54 31.65,90.54 ; RL2.1@31.65,92.25 31.65,90.54 ; C13.1@32.525,90.54 31.65,90.54 ; C54.2@46.314,90.54 47.189,90.54 ; RL1.1@47.189,92.25 47.189,90.54 ; C12.1@48.064,90.54 47.189,90.54
+Amp1: C69.2 IC2.3 IC3.5 R6.2 | length 9
  Top Layer w0.4: IC3.5@42.21,56.965 42.96,56.965 43.51,56.415 ; v2(43.51,55.24) 43.51,56.415 ; IC2.3@47.062,55.24 47.062,56.165 46.812,56.415 43.51,56.415
  Bottom Layer w0.8: C69.2@42.65,55.24 R6.2@44.4,55.24
+Amp2: C71.1 IC3.3 IC6.3 R13.2 | length 6.9
  Top Layer w0.4: v1(34.225,55.24) 34.225,55.39 34.225,56.165 35.675,57.615 IC3.3@37.81,57.615
  Bottom Layer w0.8: v1(34.225,55.24) R13.2@35.975,55.24
+Amp3: C78.2 IC8.3 IC9.5 R39.2 | length 9
  Top Layer w0.4: IC9.5@22.185,56.965 22.935,56.965 23.485,56.415 ; v2(23.485,55.24) 23.485,56.415 ; IC8.3@27.037,55.24 27.037,56.165 26.787,56.415 23.485,56.415
  Bottom Layer w0.8: C78.2@22.612,55.24 R39.2@24.357,55.24
+Amp4: C80.1 IC9.3 IC11.3 R46.2 | length 6.9
  Top Layer w0.4: v1(14.2,55.24) 14.2,56.165 15.65,57.615 IC9.3@17.785,57.615
  Bottom Layer w0.8: v1(14.2,55.24) R46.2@15.95,55.24
-5: C20.1 C21.1 C22.1 C23.1 C28.1 C29.1 C30.1 C31.1 C36.2 C37.2 C38.2 C39.2 C44.2 C45.2 C46.2 C47.2 C60.2 C61.2 C64.2 C65.2 C97.2 IC2.4 IC3.4 IC3.9 IC4.4 IC6.4 IC7.4 IC8.4 IC9.4 IC9.9 IC10.4 IC11.4 IC12.4 L2.2 pad.@9.525,55.6 pad.@32.975,74.975 pad.@50.475,55.6 | length 46.1
  Top Layer w0.2: IC11.4@15.47,55.24 IC11.4@15.62,55.09 ; IC9.9@19.795,57.94 IC9.9@20,57.735 ; IC4.4@21.715,75.455 IC4.4@21.735,75.435 ; IC6.4@35.495,55.24 IC6.4@35.645,55.09 ; IC3.9@39.82,57.94 IC3.9@40.027,57.733
  Top Layer w0.4: C23.1@17.02,55.24 17.02,56.965 IC9.4@17.785,56.965 18.82,56.965 IC9.9@19.795,57.94 ; v1(37.045,55.24) 37.045,56.965 38.845,56.965 IC3.9@39.82,57.94
  Top Layer w0.6: IC11.4@15.47,55.24 15.473,55.243 v1(17.001,55.243) ; IC7.4@18.235,79.245 v1(18.235,80.8) ; v1(21.735,73.88) IC4.4@21.735,75.435 ; v2(28.315,53.49) IC8.4@28.315,55.24 ; IC6.4@35.495,55.24 35.498,55.243 37.042,55.243 v1(37.045,55.24) ; v2(48.34,53.49) IC2.4@48.34,55.24
  Top Layer w0.8: C39.2@17.02,53.49 C23.1@17.02,55.24 ; v1(18.235,73.88) v1(21.735,73.88) ; v1(18.235,80.8) C28.1@19.985,80.8 v1(21.735,80.8) ; v2(20,56.118) IC9.9@20,57.735 ; C38.2@27.44,53.49 C22.1@29.19,53.49 ; C37.2@37.045,53.49 v1(37.045,55.24) ; v2(40.027,56.121) IC3.9@40.027,57.733 ; C36.2@47.465,53.49 C20.1@49.215,53.49
  Bottom Layer w0.6: v1(18.235,73.88) IC12.4@18.235,75.435 ; IC10.4@21.735,79.245 v1(21.735,80.8)
  Bottom Layer w0.8: v1(18.235,73.88) C31.1@19.985,73.88 ; C46.2@19.985,80.8 v1(21.735,80.8) ; C61.2@20,55.243 v2(20,56.118) ; C60.2@40.027,55.24 v2(40.027,56.121)
-7: C90.2 C92.2 J4.51 L1.1
CH1: C76.2 IC4.3 IC7.3 | length 11.3
  Top Layer w0.6: IC7.3@18.235,77.975 19.35,77.975 20.62,76.705 IC4.3@21.735,76.705 22.46,76.705 23.1,76.065 23.1,70.726 C76.2@22.904,70.53
CH1_1: IC4.2 IC4.6 pad.@32.975,87.147 RL2.4 | length 31.6
  Top Layer w0.6: IC4.2@21.735,77.975 25.115,77.975 ; IC4.6@27.135,76.705 26.385,76.705 25.115,77.975 ; RL2.4@31.65,99.85 32.975,98.525 32.975,89.05 pad.@32.975,87.147 25.115,79.287 25.115,77.975
CH1_2: IC7.2 IC7.6 pad.@17.436,87.147 RL3.4 | length 28.9
  Top Layer w0.6: IC7.6@12.835,77.975 16.215,77.975 ; RL3.4@16.111,99.85 17.436,98.525 pad.@17.436,87.147 16.215,85.926 16.215,77.975 ; IC7.2@18.235,76.705 17.485,76.705 16.215,77.975
CLK_MODE: J4.3 R34.1 | length 14
  Top Layer w0.5: v1(15.5,4.5) R34.1@15.5,15.7
  Bottom Layer w0.5: v1(15.5,4.5) J4.3@15.5,7.35